# Altium PCB WaveshapeLFO_v1_Controls_PCB.PcbDoc
Units mm, origin at the board's own origin, x right, y up, seen from the top; angles counter-clockwise.
Board outline 40 x 105 mm, 2 copper layers (Top Layer, Bottom Layer); 26 components, 27 nets, 90 pads, 29 vias.
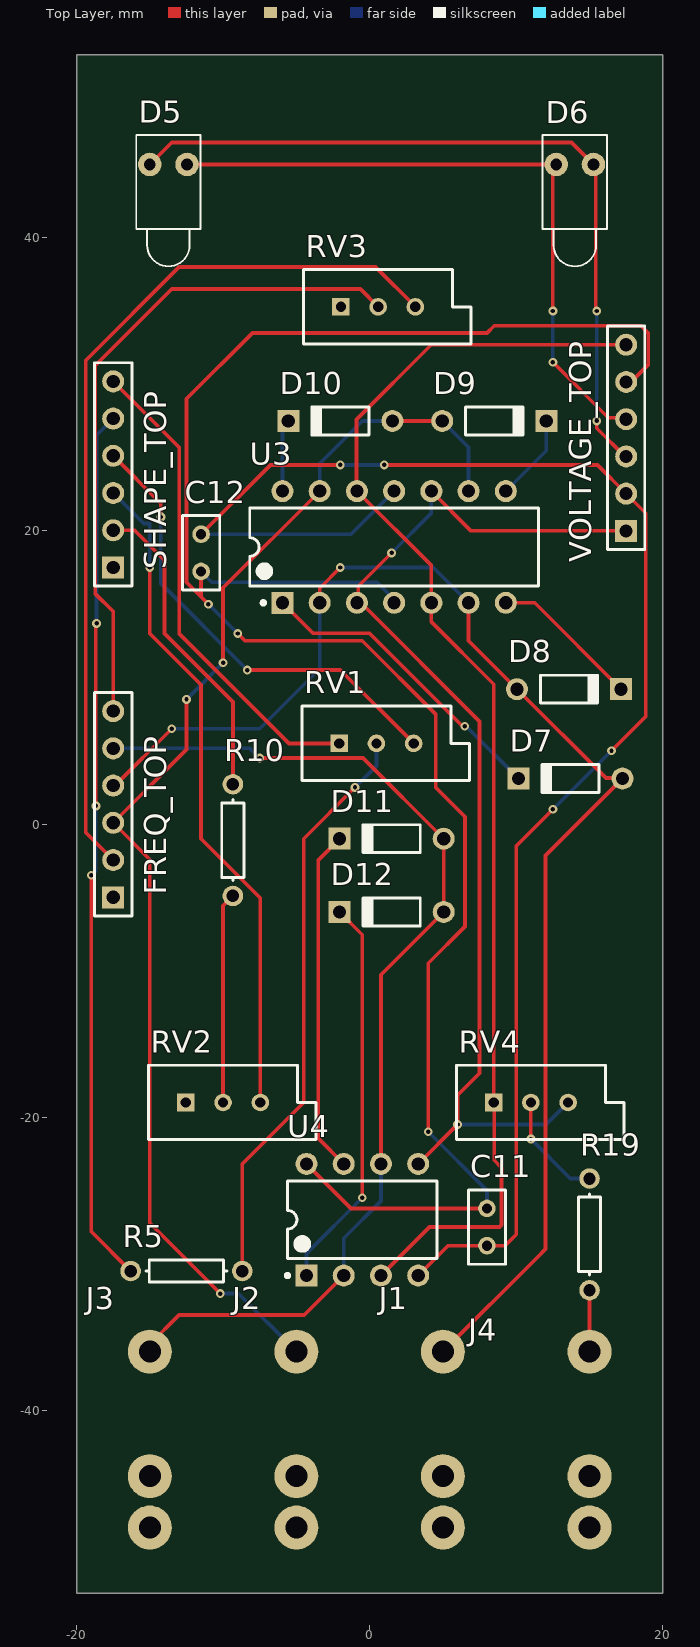
[diagram p0: Top Layer view]
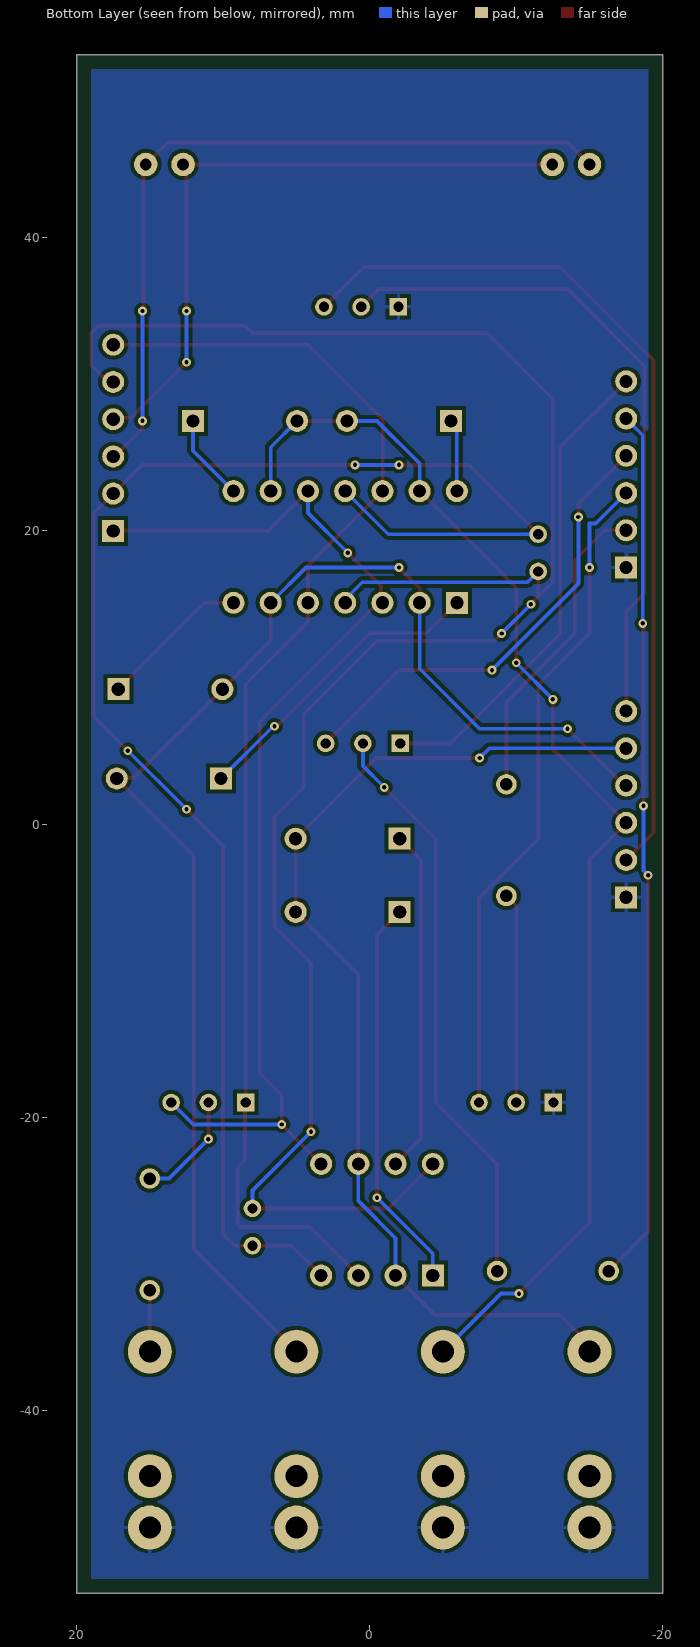
[diagram p1: Bottom Layer view, seen from below]

## Layer stack, top to bottom
Top Solder: solder mask 0.0102, Solder Resist, Dk 3.5
Top Layer: signal copper 0.0356
Dielectric 1: dielectric 0.32, FR-4, Dk 4.8
Bottom Layer: signal copper 0.0356
Bottom Solder: solder mask 0.0102, Solder Resist, Dk 3.5

## Board outline
-20,-52.5 20,-52.5 20,52.5 -20,52.5

## Design rules (kind name [scope] priority, off if disabled: settings)
Clearance [All] p1: gap=0.254 ignorepadtopadclearanceinfootprint=FALSE except(0: Arc-Hole Track-Hole SMDPad-Hole THPad-Hole Via-Hole Fill-Hole Poly-Hole Region-Hole Text-Hole)
PolygonConnect [All] p1: connectstyle=Relief reliefconductorwidth=0.254 reliefentries=4 polygonreliefangle="90 Angle" airgapwidth=0.254
RoutingVias [All] p1: holewidth=0.711 width=1.27 viastyle="Through Hole" minholewidth=0.711 minwidth=1.27 maxholewidth=0.711 maxwidth=1.27
SolderMaskExpansion [All] p1: expansion=0.102 istentingtop=FALSE
Width [All] p1: maxlimit=0.254 minlimit=0.254 preferedwidth=0.254
30 further rules are at their usual default settings.

## Components (designator, comment, footprint, x,y, rotation, side; value= is the part's Value field where it differs from the comment)
C11 "Cap" RAD-0.1 8,-27.5 r90 top value=1n
C12 "Cap" RAD-0.1 -11.5,18.5 r270 top value=1n
D5 "LED0" LED-1 -13.73,45 r270 top
D6 "LED0" LED-1 14,45 r270 top
D7 "Diode 1N4148" DO-35 13.7,3.1 r180 top
D8 "Diode 1N4148" DO-35 13.6,9.2 r0 top
D9 "Diode 1N4148" DO-35 8.5,27.5 r0 top
D10 "Diode 1N4148" DO-35 -2,27.5 r180 top
D11 "Diode 1N4148" DO-35 1.5,-1 r180 top
D12 "Diode 1N4148" DO-35 1.5,-6 r180 top
FREQ_TOP "Header 6" HDR1X6 -17.5,-5 r90 top
J1 "Audio Jack" "Audio Jack" 5,-36 r180 top
J2 "Audio Jack" "Audio Jack" -5,-36 r180 top
J3 "Audio Jack" "Audio Jack" -15,-36 r180 top
J4 "Audio Jack" "Audio Jack" 15,-36 r180 top
R5 "" AXIAL-0.3 -12.5,-30.5 r0 top value=100
R10 "" AXIAL-0.3 -9.33,-1.1 r90 top value=100K
R19 "" AXIAL-0.3 15,-28 r270 top value=10k
RV1 "RPot" VR5 0.46,5.5 r0 top value="100k LIN"
RV2 "j" VR5 -10,-19 r0 top value="25k LIN"
RV3 "RPot" VR5 0.578,35.288 r0 top value="1M LOG"
RV4 "RPot" VR5 11,-19 r0 top value=10k
SHAPE_TOP "Header 6" HDR1X6 -17.5,17.5 r90 top
U3 "TL074" N0014A 1.67,18.9 r90 top
U4 "TL072CP" P0008A -0.5,-27 r90 top
VOLTAGE_TOP "Header 6" HDR1X6 17.5,20 r90 top

## Footprints (in the part's own frame and the unit in brackets; to place one, negate y for a bottom-side part, rotate by r counter-clockwise, add the part's x,y. Pads: shape width x height; smd on the part's side, far side on the other; paste and mask are expansions set on the pad)
"Audio Jack" [mm]
  round 3 hole 1.5: 1(0,0) 2(0,8.5) 3(0,12)
AXIAL-0.3 [mm] "Axial Device, Thru-Hole; 2 Leads; 0.3 in Pin Spacing"
  round 1.4 hole 0.85: 1(-3.81,0) 2(3.81,0)
  silkscreen extent -2.77,-0.76 2.77,0.76
DO-35 [mm] "Diode, Axial; Body 3.8 x 1.9 mm (LxDia. max), Lead Dia. 0.53 mm (max)"
  round 1.5 hole 0.9: 1(-3.55,0)
  rect 1.5x1.5 hole 0.9: 2(3.55,0)
  silkscreen extent -1.95,-0.95 2.05,0.95
HDR1X6 [mm] "Connector; Header; 6 Position"
  rect 1.5x1.5 hole 0.9: 1(0,0)
  round 1.5 hole 0.9: 2(2.54,0) 3(5.08,0) 4(7.62,0) 5(10.16,0) 6(12.7,0)
  silkscreen extent -1.27,-1.27 13.97,1.27
LED-1 [mm] "LED; 2 Leads"
  round 1.6 hole 0.8: 1(0,1.27) 2(0,-1.27)
  silkscreen extent -2,-2.2 6.95,2.2
N0014A [mm] "DIP, 14-Leads, Body 19.7x6.6mm, Pitch 2.54mm"
  rect 1.5x1.5 hole 0.9: 1(-3.81,7.62)
  round 1.5 hole 0.9: 2(-3.81,5.08) 3(-3.81,2.54) 4(-3.81,0) 5(-3.81,-2.54) 6(-3.81,-5.08) 7(-3.81,-7.62) 8(3.81,-7.62) 9(3.81,-5.08) 10(3.81,-2.54) 11(3.81,0) 12(3.81,2.54) 13(3.81,5.08) 14(3.81,7.62)
  silkscreen extent -3.93,-9.85 2.65,9.85, body extent -3.95,-9.85 3.95,9.85, height 5.08
P0008A [mm] "DIP, 8-Leads, Body 10.15x6.6mm, Pitch 2.54mm"
  rect 1.5x1.5 hole 0.9: 1(-3.81,3.81)
  round 1.5 hole 0.9: 2(-3.81,1.27) 3(-3.81,-1.27) 4(-3.81,-3.81) 5(3.81,-3.81) 6(3.81,-1.27) 7(3.81,1.27) 8(3.81,3.81)
  silkscreen extent -3.93,-5.1 2.65,5.23, body extent -3.95,-5.07 3.95,5.07, height 5.08
RAD-0.1 [mm] "Radial Cap, Thru-Hole; 2 Leads; 0.1 in Pin Spacing"
  round 1.2 hole 0.7: 1(-1.27,0) 2(1.27,0)
  silkscreen extent -2.54,-1.27 2.54,1.27
VR5 [mm] "Thru-Hole; 3 Leads"
  rect 1.2x1.2 hole 0.7: 1(-2.54,0)
  round 1.2 hole 0.7: 2(0,0) 3(2.54,0)
  silkscreen extent -5.08,-2.54 6.35,2.54

## Part data
C11 C12: "Capacitor", LatestRevisionDate=17-Jul-2002, LatestRevisionNote="Re-released for DXP Platform.", PackageDescription="Radial Cap, Thru-Hole; 2 Leads; 0.3 in Pin Spacing", PackageReference=RAD-0.3, Published=8-Jun-2000, Publisher="Altium Limited"
D5 D6: "Typical INFRARED GaAs LED", LatestRevisionDate=08-Jul-2005, LatestRevisionNote="Mech Layer 1 removed.", PackageDescription="LED; 2 Leads", PackageReference=LED-0, Published=8-Jun-2000, Publisher="Altium Limited"
D7 D8 D9 D10 D11 D12: "High Conductance Fast Diode", Code_JEDEC=DO-204-AH, ComponentLink1Description="Manufacturer Link", ComponentLink1URL=http://www.fairchildsemi.com/, ComponentLink2Description=Datasheet, ComponentLink2URL=http://www.fairchildsemi.com/ds/1N%2F1N4148.pdf, DatasheetVersion=1997, LatestRevisionDate=17-Jul-2002, LatestRevisionNote="Re-released for DXP Platform.", PackageDescription="Diode, Axial; Body 3.8 x 1.9 mm (LxDia. max), Lead Dia. 0.53 mm (max)", PackageReference=DO-35, Published=8-Jun-2000, Publisher="Altium Limited"
FREQ_TOP SHAPE_TOP VOLTAGE_TOP: "Header, 6-Pin", LatestRevisionDate=17-Jul-2002, LatestRevisionNote="Re-released for DXP Platform.", Publisher="Altium Limited", System=Connector
R5 R10 R19: library part Res1, "Resistor", LatestRevisionDate=17-Jul-2002, LatestRevisionNote="Re-released for DXP Platform.", PackageDescription="Axial Device, Thru-Hole; 2 Leads; 0.3 in Pin Spacing", PackageReference=AXIAL-0.3, Published=8-Jun-2000, Publisher="Altium Limited"
RV1 RV3 RV4: "Potentiometer", LatestRevisionDate=17-Jul-2002, LatestRevisionNote="Re-released for DXP Platform.", PackageDescription="Variable Resistor, Thru-Hole; 3 Leads", PackageReference=VR5, Published=8-Jun-2000, Publisher="Altium Limited", Set Position=0.5, Sim Note="Enter the Resistance value and the set point into parameter fields."
RV2: library part RPot, "Potentiometer", LatestRevisionDate=17-Jul-2002, LatestRevisionNote="Re-released for DXP Platform.", PackageDescription="Variable Resistor, Thru-Hole; 3 Leads", PackageReference=VR5, Published=8-Jun-2000, Publisher="Altium Limited", Set Position=0.5, Sim Note="Enter the Resistance value and the set point into parameter fields."
U3: library part CMP-0015-00129-2, "Quad Low-Noise JFET-Input General-Purpose Operational Amplifier, 7 to 36 V, 0 to 70 degC, 14-pin DIP (N14), Pb-Free (RoHS)", Manufacturer="Texas Instruments", PartNumber=TL074CN, Rating=Military, Total Supply Voltage(Max)(+5V is 5, +/-5V is 10)=36, Total Supply Voltage(Min)(+5V is 5, +/-5V is 10)=7, CMRR(Min)(dB)=70, Code_JEDEC=MS-001, ComponentLink1Description="Manufacturer URL", ComponentLink1URL=http://www.ti.com/, ComponentLink2Description=Datasheet, ComponentLink2URL=http://www.ti.com/lit/ds/symlink/tl074.pdf, ComponentLink3Description="Package Specification", ComponentLink3URL=http://www.ti.com/lit/ml/mpdi002c/mpdi002c.pdf, DatasheetVersion=SLOS080J, Eco-Plan="Pb-Free (RoHS)", GBW(Typ)(MHz)=3, IIB(Max)(pA)=200, Iq per channel(Max)(mA)=2.5, Mounting Technology="Through Hole", Number of Channels=4, Offset Drift(Typ)(uV/C)=18, PackageDescription="14-Pin Plastic In-Line, Body 19.305 x 6.35 mm, Pitch 2.54 mm", PackageReference=N0014A, PackageVersion="4040049/E, 12/2002", Slew Rate(Typ)(V/us)=13, Sub Family="General Purpose Amplifier, High Supply Voltage Amplifier (>=30V)", Vio (25C)(Max)(mV)=10, Vn at 1kHz(Typ)(nV/rtHz)=18
U4: library part CMP-0017-00950-2, "Dual Low-Noise JFET-Input General-Purpose Operational Amplifier, 7 to 36 V, 0 to 70 degC, 8-pin DIP (P8), Pb-Free (RoHS)", Manufacturer="Texas Instruments", Rating=Catalog, Total Supply Voltage(Max)(+5V is 5, +/-5V is 10)=36, Total Supply Voltage(Min)(+5V is 5, +/-5V is 10)=7, CMRR(Min)(dB)=70, Code_JEDEC=MS-001, ComponentLink1Description="Manufacturer URL", ComponentLink1URL=http://www.ti.com/, ComponentLink2Description=Datasheet, ComponentLink2URL=http://www.ti.com/lit/ds/symlink/tl072.pdf, ComponentLink3Description="Package Specification", ComponentLink3URL=http://www.ti.com/litv/pdf/mpdi001b, DatasheetVersion=SLOS080J, Eco-Plan="Pb-Free (RoHS)", GBW(Typ)(MHz)=3, IIB(Max)(pA)=200, Iq per channel(Max)(mA)=2.5, Mounting Technology="Through Hole", Number of Channels=2, Offset Drift(Typ)(uV/C)=18, PackageDescription="8-Pin Plastic In-Line, Body 9.59 x 6.35 mm, Pitch 2.54 mm", PackageReference=P0008A, PackageVersion="4040082/E, 04/2010", PartNumber=TL072CP, Slew Rate(Typ)(V/us)=13, Sub Family="General Purpose Amplifier, High Supply Voltage Amplifier (>=30V)", Vio (25C)(Max)(mV)=10, Vn at 1kHz(Typ)(nV/rtHz)=18

## Via types
v1: diameter 0.6, hole 0.3, Top Layer to Bottom Layer, 29 vias

## Nets (pads, with @x,y where several pads share a name; then routed paths per layer and width w, separated by ;. In a path a pad name is that pad's centre, name@x,y a point inside that pad or via, vN(x,y) a via of type N, cw(c..) or ccw(c..) an arc to the next point about the centre after c; other vN are vias at no path point)
+5V: RV4.1 U3.5 U3.12 U4.3 VOLTAGE_TOP.6 | length 89.2
  Top Layer w0.254: U4.3 4.08,-27.5 8.851,-27.5 9,-27.351 9,-23.446 8.5,-22.946 8.5,-19.04 RV4.1 8.46,9.54 4.21,13.79 U3.5 4.21,17.63 U3.12 -0.895,22.735 -0.895,27.605 4.2,32.7 VOLTAGE_TOP.6
+12V: C11.2 C12.2 U3.4 U4.8 VOLTAGE_TOP.5 | length 137.9
  Top Layer w0.254: C12.2 -11.5,15.5 ; v1(-11,15) -11.5,15.5 ; v1(-9,13) -8.5,12.5 -0.5,12.5 4.5,7.5 4.5,2.5 6.5,0.5 6.5,-7 4,-9.5 v1(4,-21) ; U4.8 -1.27,-26.23 C11.2 ; VOLTAGE_TOP.5 17.837,30.16 19,31.323 19,33.5 18.5,34 8.5,34 8,33.5 -8,33.5 -12.492,29.008 -12.492,16.492 -11.5,15.5
  Bottom Layer w0.254: C12.2 -10.77,16.5 0.5,16.5 1.67,15.33 U3.4 ; v1(-11,15) v1(-9,13) ; v1(4,-21) 8,-25 C11.2
-5V: RV4.3 U3.3 U3.10 U4.5 VOLTAGE_TOP.1 | length 75.9
  Top Layer w0.254: v1(1.5,18.5) -0.779,16.221 -0.779,15.181 U3.3 -0.779,15.09 -0.59,15.09 7.5,7 7.5,-17 6,-18.5 v1(6,-20.5) U4.5 ; U3.10 6.92,20 VOLTAGE_TOP.1
  Bottom Layer w0.254: v1(1.5,18.5) 4.21,21.21 U3.10 ; v1(6,-20.5) 12.04,-20.5 RV4.3
-12V: C11.1 C12.1 U3.11 U4.4 VOLTAGE_TOP.2 | length 108.8
  Top Layer w0.254: C12.1 -6.77,24.5 v1(-2,24.5) ; v1(1,24.5) 15.54,24.5 VOLTAGE_TOP.2 18.838,21.202 18.838,7.338 v1(16.5,5) ; U4.4 5.35,-28.77 C11.1 9.23,-28.77 10,-28 10,-1.5 v1(12.5,1)
  Bottom Layer w0.254: C12.1 -1.27,19.77 U3.11 ; v1(-2,24.5) v1(1,24.5) ; v1(12.5,1) v1(16.5,5)
GND: FREQ_TOP.1 J1.3 J2.3 J3.3 J4.3 RV2.1 RV3.1 SHAPE_TOP.1
J3_out: D7.1 D8.1 FREQ_TOP.4 J1.1 U3.2 U3.6 | length 96.8
  Top Layer w0.254: FREQ_TOP.4 -17.38,2.62 v1(-13.5,6.5) ; U3.2 -3.41,16.09 v1(-2,17.5) ; J1.1@5,-37 J1.1 11.5,-29.5 12,-29 12,-2.15 D7.1 17.219,3.131 16.119,3.131 D8.1 6.75,12.5 U3.6
  Bottom Layer w0.254: v1(-13.5,6.5) -7.5,6.5 -3.41,10.59 U3.2 ; v1(-2,17.5) 4.34,17.5 U3.6
J4_out: D9.1 D10.1 FREQ_TOP.3 J2.1 U3.9 U3.13 | length 87.4
  Top Layer w0.254: v1(-12.5,8.5) -12.5,5.08 FREQ_TOP.3 -15,-2.42 -15,-27.229 v1(-10.188,-32.04) ; v1(-10,11) -10,16.12 U3.13 ; D10.1 D9.1
  Bottom Layer w0.254: v1(-12.5,8.5) v1(-10,11) ; v1(-10.188,-32.04) -8.96,-32.04 J2.1 ; U3.13 -3.41,24.59 -0.5,27.5 D10.1 ; D9.1 6.75,25.7 U3.9
J5_out: D11.1 D12.1 FREQ_TOP.5 J3.1 U4.2 U4.6 | length 73.4
  Top Layer w0.254: J3.1 -15.001,-35.501 -13,-33.5 -4.46,-33.5 U4.2 ; v1(-7.5,4.5) -0.45,4.5 D11.1 D12.1 0.77,-10.28 U4.6
  Bottom Layer w0.254: FREQ_TOP.5 -8.16,5.16 v1(-7.5,4.5) ; U4.2 -1.77,-28.27 0.77,-25.73 U4.6
LED1_TOP: D5.1 D6.2 VOLTAGE_TOP.4 | length 45.4
  Top Layer w0.254: D5.1 D6.2 12.5,44.77 v1(12.5,35) ; v1(12.5,31.5) 16.275,27.725 17.395,27.725 VOLTAGE_TOP.4
  Bottom Layer w0.254: v1(12.5,31.5) v1(12.5,35)
LED2_TOP: D5.2 D6.1 VOLTAGE_TOP.3 | length 52.4
  Top Layer w0.254: D5.2 -13.5,46.5 13.77,46.5 D6.1 15.434,44.836 15.434,35.066 v1(15.5,35) ; v1(15.5,27.5) 15.5,27 17.42,25.08 VOLTAGE_TOP.3
  Bottom Layer w0.254: v1(15.5,27.5) v1(15.5,35)
NetD7_2: D7.2 U3.1 | length 21.1
  Top Layer w0.254: U3.1 -3.868,13.008 -0.008,13.008 6.328,6.672 v1(6.493,6.672)
  Bottom Layer w0.254: v1(6.493,6.672) 6.578,6.672 D7.2
NetD8_2: D8.2 U3.7 | length 10.3
  Top Layer w0.254: U3.7 11.26,15.09 D8.2
NetD9_2: D9.2 U3.8 | length 5.9
  Bottom Layer w0.254: U3.8 12.05,25.47 D9.2
NetD10_2: D10.2 U3.14 | length 5
  Bottom Layer w0.254: U3.14 -5.95,27.1 D10.2
NetD11_2: D11.2 U4.7 | length 23.5
  Top Layer w0.254: D11.2 -3.5,-2.45 -3.5,-21.46 U4.7
NetD12_2: D12.2 U4.1 | length 27
  Top Layer w0.254: D12.2 -0.5,-7.55 v1(-0.5,-25.5)
  Bottom Layer w0.254: U4.1 -4.31,-29.31 v1(-0.5,-25.5)
NetFREQ_TOP_2: FREQ_TOP.2 RV3.3 | length 61.1
  Top Layer w0.254: FREQ_TOP.2 -19.362,-0.598 -19.362,31.638 -13,38 0.407,38 RV3.3
NetFREQ_TOP_6: FREQ_TOP.6 RV3.2 | length 46.1
  Top Layer w0.254: FREQ_TOP.6 -17.5,14.5 -18.731,15.731 -18.731,31.269 -13.5,36.5 -0.633,36.5 RV3.2
NetJ4_1: J4.1 R19.2 | length 4.2
  Top Layer w0.254: J4.1 R19.2
NetR5_1: R5.1 SHAPE_TOP.5 | length 59.9
  Top Layer w0.254: v1(-19,-3.5) -19,-27.81 R5.1 ; v1(-18.681,1.232) -18.681,13.634 v1(-18.631,13.684)
  Bottom Layer w0.254: v1(-19,-3.5) -18.681,-3.181 v1(-18.681,1.232) ; v1(-18.631,13.684) -18.631,26.529 SHAPE_TOP.5
NetR5_2: R5.2 RV1.2 | length 39.8
  Top Layer w0.254: R5.2 -8.69,-23.19 -4.5,-19 -4.5,-1 v1(-1,2.5)
  Bottom Layer w0.254: v1(-1,2.5) 0.46,3.96 RV1.2
NetR10_1: R10.1 RV2.2 | length 14.4
  Top Layer w0.254: RV2.2 -10,-5.58 R10.1
NetR10_2: R10.2 SHAPE_TOP.2 | length 21.6
  Top Layer w0.254: SHAPE_TOP.2 -16.04,20.04 -14,18 -14,13 -9.33,8.33 R10.2
NetR19_1: R19.1 RV4.2 | length 7.6
  Top Layer w0.254: v1(11,-21.5) RV4.2
  Bottom Layer w0.254: v1(11,-21.5) 13.69,-24.19 R19.1
NetRV1_1: RV1.1 SHAPE_TOP.6 | length 33.1
  Top Layer w0.254: SHAPE_TOP.6 -13,25.7 -13,13 -5.5,5.5 RV1.1
NetRV1_3: RV1.3 SHAPE_TOP.4 | length 31.7
  Top Layer w0.254: SHAPE_TOP.4@-17.521,25.141 -14.255,21.875 -14.255,20.953 v1(-14.245,20.943) ; v1(-8.345,10.5) -2,10.5 RV1.3@2.88,5.62
  Bottom Layer w0.254: v1(-14.245,20.943) -14.245,16.4 v1(-8.345,10.5)
NetRV2_3: RV2.3 SHAPE_TOP.3 | length 46
  Top Layer w0.254: v1(-15,17.5) -15,13 -11.5,9.5 -11.5,-1 -7.46,-5.04 RV2.3@-7.46,-19.019
  Bottom Layer w0.254: SHAPE_TOP.3 -15.42,20.5 -15,20.5 v1(-15,17.5)
pads on no net: J1.2 J2.2 J3.2 J4.2

## Polygon pours and split planes (outlines as drawn)
GND on Bottom Layer "GND_L02_P006" (solid, remove dead copper, pour order 6): -19,-51.5 -19,51.5 19,51.5 19,-51.5
no net on Bottom Layer "NONET_L02_P003" (solid, remove dead copper, pour order 3): 22,-50.5
no net on Bottom Layer "NONET_L02_P001" (solid, remove dead copper, pour order 1): -31,-47.5

## Silkscreen, mask and mechanical layers (free items; w line width, h text height)
Mechanical 1:
  the board outline again, w0.254